# EAGLE board relay-unit-atmega (EAGLE 6.5.0)
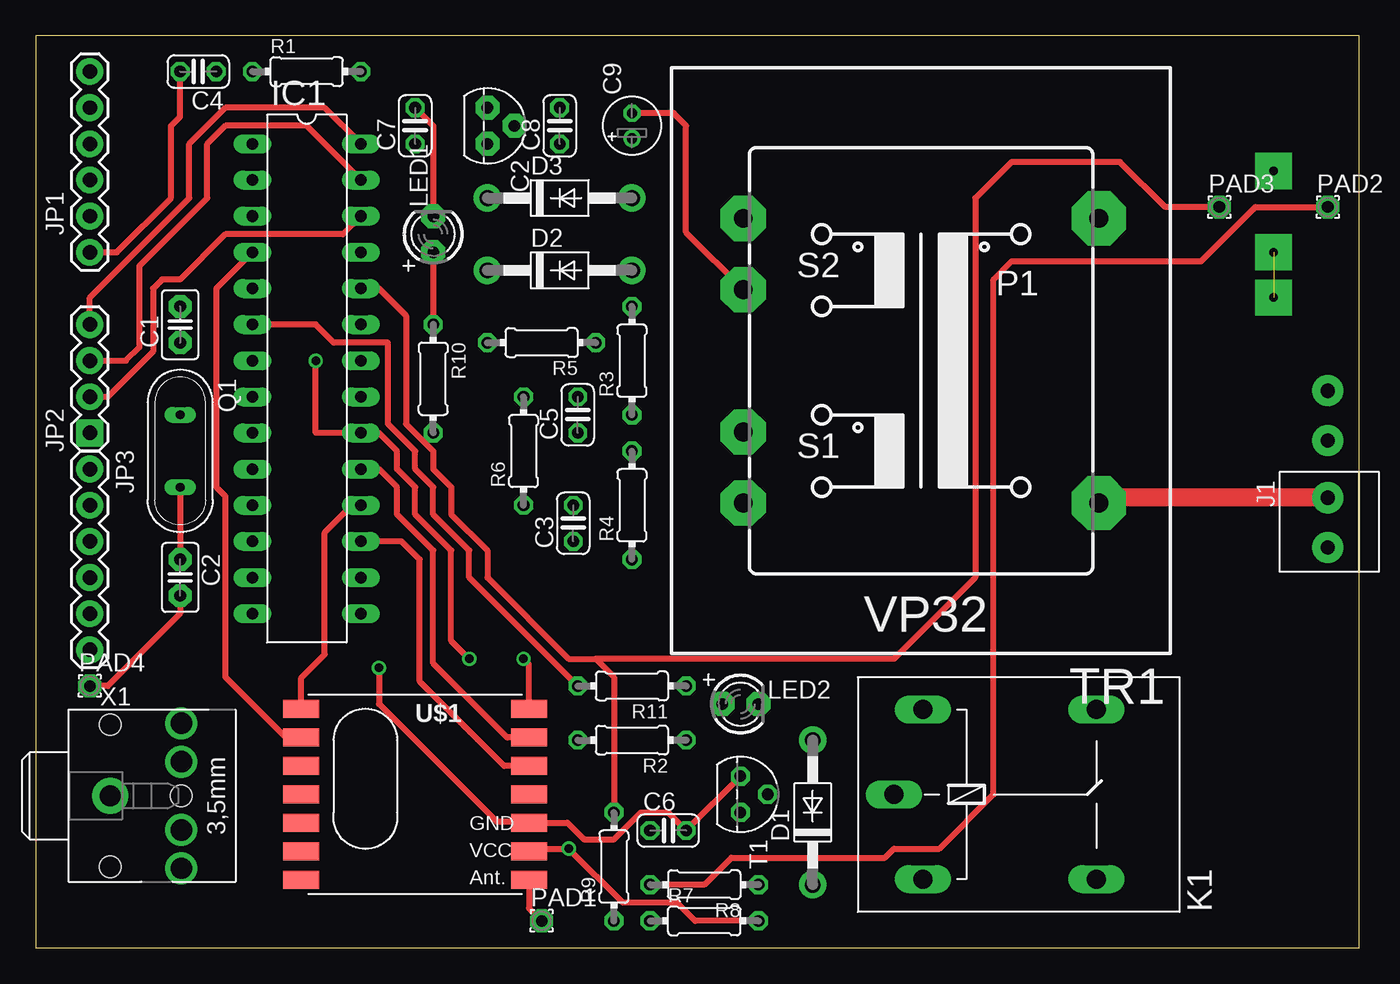
[diagram p0: board, top side]
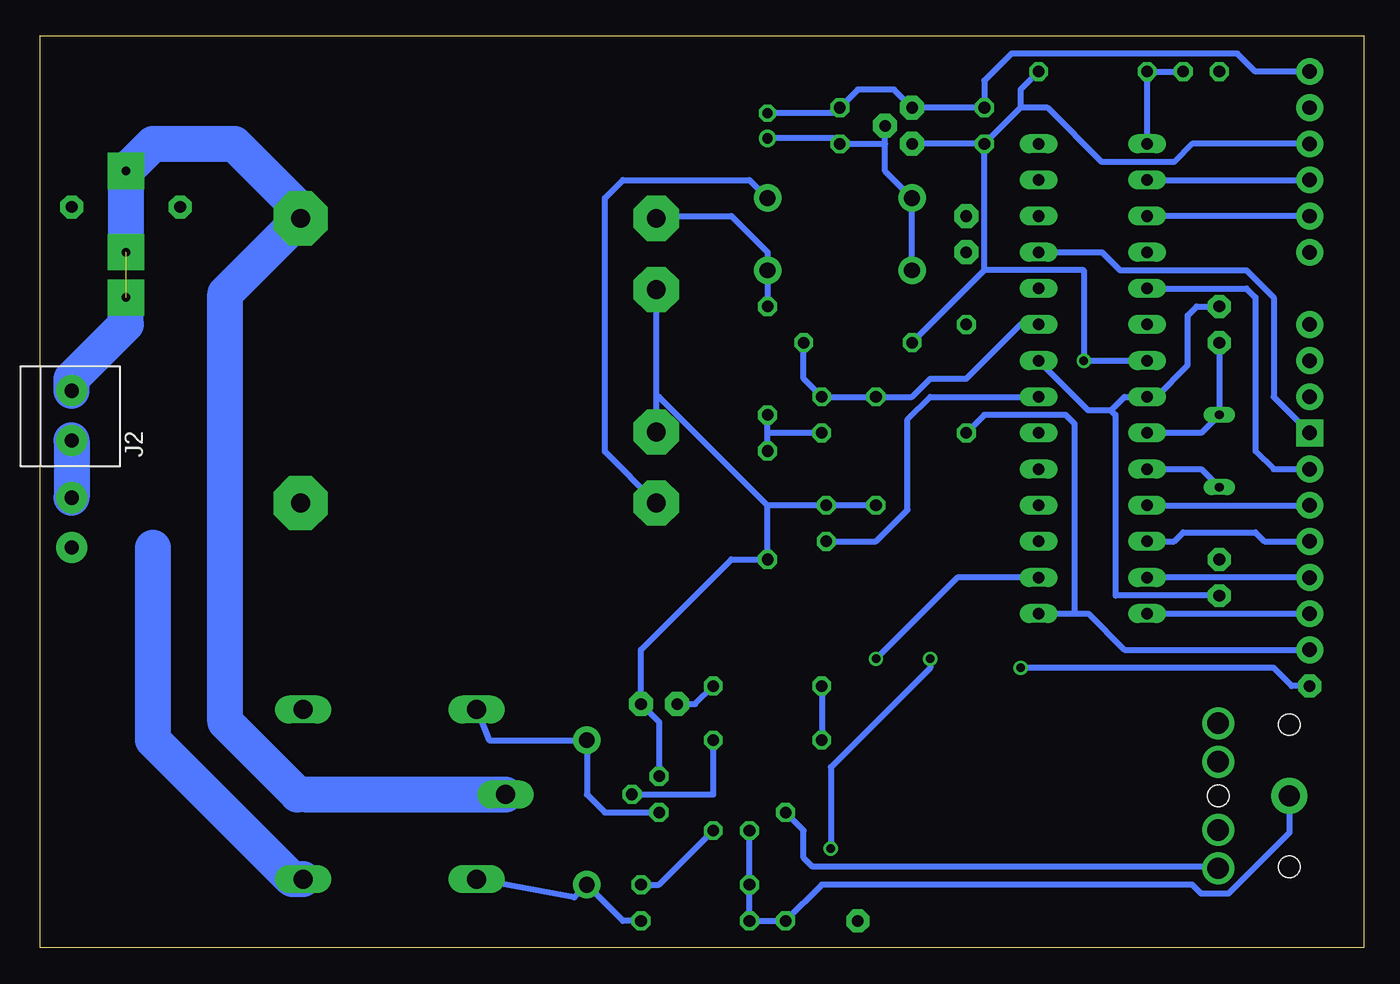
[diagram p1: board, bottom side, seen from below]

Size 93.02 x 64.12 mm. Coordinates in mm from the lower left corner, seen from the top.
Outline: 0,0 93.02,0 93.02,64.12 0,64.12 0,0
Copper layers (1*16): Top 0.035mm / dielectric 1.5mm / Bottom 0.035mm
Design rules "default": minimum track width 10mil, minimum drill 24mil, track to track 8mil, track to pad 8mil, pad to pad 8mil, via to via 8mil, smd to smd 8mil, copper to edge 40mil, drill to drill 8mil, minimum pad ring 10mil, minimum via ring 8mil, stop-mask expansion 4mil, vias tented up to drill 0mil, thermal gap 10mil

## Footprints (pad centres in the part's own frame; a part is rotated, then mirrored left to right if it is on the bottom)
C2.5-2 = drill 0.813 pad 1.6 octagon: 1 -1.27,0; 2 1.27,0
C025-024X044 = drill 0.813 octagon: 1 -1.27,0; 2 1.27,0
E1,8-4 = drill 0.711 pad 1.168: + -0.889,0 | drill 0.711 pad 1.168 octagon: - 0.889,0
DO41-10 = drill 1.118 pad 1.93: A 5.08,0; C -5.08,0
DIL28-3 = drill 0.813 long: 1 -16.51,-3.81; 2 -13.97,-3.81; 3 -11.43,-3.81; 4 -8.89,-3.81; 5 -6.35,-3.81; 6 -3.81,-3.81; 7 -1.27,-3.81; 8 1.27,-3.81; 9 3.81,-3.81; 10 6.35,-3.81; 11 8.89,-3.81; 12 11.43,-3.81; 13 13.97,-3.81; 14 16.51,-3.81; 15 16.51,3.81; 16 13.97,3.81; 17 11.43,3.81; 18 8.89,3.81; 19 6.35,3.81; 20 3.81,3.81; 21 1.27,3.81; 22 -1.27,3.81; 23 -3.81,3.81; 24 -6.35,3.81; 25 -8.89,3.81; 26 -11.43,3.81; 27 -13.97,3.81; 28 -16.51,3.81
TO92 = drill 0.813 pad 1.676 octagon: 1 -1.27,0; 2 0,1.905; 3 1.27,0
1X2-3.5MM = drill 1 pad 2.184: 1 1.8,0; 2 -1.7,0
FTDI_BASIC = drill 1.016 pad 1.88: CTS 10.16,0; DTR 0,0; GND 12.7,0; RXI 2.54,0; TXO 5.08,0; VCC 7.62,0
1X04 = drill 1.016 pad 1.88 square: 1 0,0 | drill 1.016 pad 1.88: 2 2.54,0; 3 5.08,0; 4 7.62,0
1X06 = drill 1.016 pad 1.88: 1 0,0; 2 2.54,0; 3 5.08,0; 4 7.62,0; 5 10.16,0; 6 12.7,0
G5LE = drill 1.321 long: 1 -7.493,-5.969; 2 -7.493,5.969; O 4.699,5.969; P -9.525,0; S 4.699,-5.969
LED3MM = drill 0.813 pad 1.676 octagon: A -1.27,0; K 1.27,0
1,6/0,8 = drill 0.813 pad 1.6 octagon: 1 0,0
QS = drill 0.61 long: 1 -2.54,0; 2 2.54,0
0204/7 = drill 0.813 octagon: 1 -3.81,0; 2 3.81,0
TO92' = drill 0.813 octagon: 1 1.27,0; 2 0,1.905; 3 -1.27,0
VP32 = drill 1.321 pad 3.81 octagon: 1 -12.497,-10.008; 2 -12.497,10.008 | drill 1.321 pad 3.175 octagon: 3 12.497,10.008; 4 12.497,5.004; 5 12.497,-5.004; 6 12.497,-10.008
RFM12B = smd 2.54 x 1.27: ANT 8,-6; FFS -8,2; GND 8,-2; IRQ -8,4; P$8 -8,0; P$9 -8,-2; P$10 -8,-4; P$12 -8,-6; P$16 8,0; SCK 8,4; SDI 8,2; SDO -8,6; SEL 8,6; VDD 8,-4
STX3100 = drill 1.5 pad 2.54: 1 2.7,-0.1 | drill 1.5: 2 7.7,5; 3 7.7,2.3; 4 7.7,-2.5; 5 7.7,-5.2 | hole 1.5: 2.7,4.9; 2.7,-5.1; 7.7,-0.1

## Placement (x,y rotation side)
C1  22pF  [C2.5-2]  10.16,43.81 90 top
C2  22pF  [C2.5-2]  10.16,26.03 270 top
C3  0.1u  [C025-024X044]  37.78,29.84 90 top
C4  0.1u  [C025-024X044]  11.43,61.59 180 top
C5  10uF  [C025-024X044]  38.1,37.47 90 top
C6  10uF  [C025-024X044]  44.45,8.25 0 top
C7  0.1u  [C025-024X044]  26.67,57.78 90 top
C8  0.1u  [C025-024X044]  36.83,57.78 90 top
C9  10uf  [E1,8-4]  41.91,57.78 90 top
D1  1N4004  [DO41-10]  54.61,9.52 90 top
D2  1N4004  [DO41-10]  36.83,47.62 0 top
D3  1N4004  [DO41-10]  36.83,52.7 0 top
IC1  ATMEGA48/88/168-PU  [DIL28-3]  19.05,40.01 270 top
IC2  [TO92]  31.75,57.78 270 top
J1  1X2-3.5MM  [1X2-3.5MM]  90.8,29.84 90 top
J2  1X2-3.5MM  [1X2-3.5MM]  90.8,37.47 270 bottom
JP1  FTDI_BASICPTH  [FTDI_BASIC]  3.81,48.89 90 top
JP2  [1X04]  3.81,36.2 90 top
JP3  [1X06]  3.81,33.66 270 top
K1  G5LE  [G5LE]  69.85,10.8 0 top
LED1  [LED3MM]  27.94,50.17 90 top
LED2  [LED3MM]  49.53,17.15 0 top
PAD1  [1,6/0,8]  35.56,1.91 0 top
PAD2  [1,6/0,8]  90.8,52.07 0 top
PAD3  [1,6/0,8]  83.19,52.07 0 top
PAD4  [1,6/0,8]  3.81,18.41 0 top
Q1  16Mhz  [QS]  10.16,34.92 270 top
R1  10k  [0204/7]  19.05,61.59 0 top
R2  10k  [0204/7]  41.91,14.61 180 top
R3  [0204/7]  41.91,41.27 90 top
R4  [0204/7]  41.91,31.12 90 top
R5  470k  [0204/7]  35.56,42.55 180 top
R6  470k  [0204/7]  34.29,34.92 90 top
R7  470k  [0204/7]  46.99,1.91 0 top
R8  470k  [0204/7]  46.99,4.45 180 top
R9  100R  [0204/7]  40.64,5.71 90 top
R10  100R  [0204/7]  27.94,40.01 270 top
R11  100R  [0204/7]  41.91,18.41 180 top
T1  2N3904  [TO92']  49.53,10.8 270 top
TR1  [VP32]  62.23,41.27 180 top
U$1  RFM12B  [RFM12B]  26.67,10.8 0 top
X1  STEREOJACK  [STX3100]  2.54,10.8 0 top

## Library data of the parts
C1 C2 = capacitor-wima
C3-C8 = resistor
C9 R1-R11 = rcl
D1-D3 IC2 J1 J2 LED1 LED2 X1 = adafruit
IC1 = atmega8
JP1-JP3 = SparkFun
K1 = relay; OC_FARNELL: unknown; OC_NEWARK: unknown
PAD1-PAD4 = wirepad
Q1 = special
T1 = transistor
TR1 = trafo
U$1 = JeeParts

## Nets
GND: C1.2 C2.2 C3.2 C6.2 C7.2 C8.2 C9.- IC1.8 IC1.22 IC2.1 JP1.GND LED1.K LED2.K PAD4.1 R4.1 R6.1 R8.1 T1.3 TR1.4 TR1.5 U$1.GND
N$1: C1.1 IC1.9 Q1.1
N$2: C2.1 IC1.10 Q1.2
N$3: C4.2 JP1.DTR
N$4: C3.1 IC1.21
N$5: IC1.5 JP3.1
N$6: IC1.16 U$1.SEL
N$7: IC1.4 U$1.IRQ
N$8: C4.1 IC1.1 R1.1
N$9: IC1.17 U$1.SDI
N$10: IC1.19 U$1.SCK
N$11: IC1.18 U$1.SDO
N$12: PAD1.1 U$1.ANT
N$13: IC1.2 JP1.TXO
N$14: IC1.3 JP1.RXI
N$15: R2.1 T1.2
N$16: D1.A K1.2 T1.1
N$17: IC1.6 R2.2 R11.2
N$19: K1.S
N$20: J1.1 J2.1 TR1.2
N$21: D2.A R3.2 TR1.6
N$22: D3.A TR1.3
N$23: C5.2 IC1.23 R5.1 R6.2
N$24: C5.1 R3.1 R4.2
N$25: IC1.24 PAD3.1 R9.2 X1.5
N$26: C6.1 PAD2.1 R7.1 R8.2 R9.1 X1.1
N$27: C8.1 C9.+ D2.C D3.C IC2.2
N$28: IC1.25 JP2.1
N$29: IC1.26 JP2.2
N$30: IC1.27 JP2.3
N$31: IC1.28 JP2.4
N$32: IC1.11 JP3.2
N$33: IC1.12 JP3.3
N$34: IC1.13 JP3.4
N$35: IC1.14 JP3.5
N$36: IC1.15 JP3.6 R10.2
N$37: LED1.A R10.1
N$38: LED2.A R11.1
N$40: J2.2 K1.P TR1.1
VCC: C7.1 D1.C IC1.7 IC1.20 IC2.3 JP1.VCC K1.1 R1.2 R5.2 R7.2 U$1.VDD

## Tracks (layer width: path | path; a pad name or v marks a point on that pad's centre or on a via)
GND  (via drill 0.6)
  Top 0.406: TR1.5 45.72,50.29 45.72,57.78 44.83,58.67 C9.- | C7.2 27.94,57.78 LED1.K | T1.3 C6.2 44.45,9.52 42.55,9.52 40.64,7.62 38.55,7.62 37.37,8.8 U$1.GND 34.58,8.89 32.38,8.89 24.13,17.15 v24.13,19.69 | C2.2 10.16,23.49 5.08,18.41 PAD4.1
  Bottom 0.406: C9.- 37.21,58.67 C8.2 35.56,60.33 33.02,60.33 IC2.1 C7.2 26.67,60.96 24.77,62.86 8.89,62.86 7.62,61.59 JP1.GND | TR1.5 49.73,38.73 | 49.73,38.73 TR1.4 | 41.91,31.12 R4.1 44.45,27.3 50.8,20.95 LED2.K 49.53,15.88 T1.3 | 41.91,31.12 49.53,38.73 49.73,38.73 | C2.2 17.46,24.77 17.46,37.47 17.78,37.78 | 17.78,37.78 16.83,38.73 IC1.8 14.61,38.73 12.38,40.96 12.38,44.45 11.75,45.09 C1.2 | R6.1 C3.2 41.91,31.12 | 17.78,37.78 19.37,37.78 IC1.22 | R8.1 49.53,4.45 C6.2 | PAD4.1 5.08,18.41 6.35,19.69 v24.13,19.69
N$1
  Bottom 0.406: C1.1 Q1.1 11.43,36.2 IC1.9
N$2
  Top 0.406: Q1.2 C2.1
  Bottom 0.406: IC1.10 11.43,33.66 Q1.2
N$3
  Top 0.406: JP1.DTR 5.71,48.89 9.52,52.7 9.52,57.78 10.16,58.42 C4.2
N$4
  Bottom 0.406: C3.1 34.29,28.58 32.07,30.8 32.07,37.15 30.48,38.73 IC1.21
N$5
  Bottom 0.406: IC1.5 8.25,46.35 7.62,45.72 7.62,34.92 6.35,33.66 JP3.1
N$6  (via drill 0.6 pad 0.41)
  Top 0.406: U$1.SEL 34.67,19.94 v34.29,20.32
  Bottom 0.406: IC1.16 28.58,26.03 v34.29,20.32
N$7
  Top 0.406: U$1.IRQ 17.59,14.8 13.34,19.05 13.34,31.75 12.7,32.38 12.7,46.35 IC1.4
N$8
  Bottom 0.406: IC1.1 R1.1 C4.1
N$9
  Top 0.406: U$1.SDI 32.92,12.8 26.99,18.73 26.99,27.3 25.72,28.58 IC1.17
N$10
  Top 0.406: U$1.SCK 33.15,14.8 27.94,20 27.94,27.94 25.4,30.48 25.4,32.38 24.13,33.66 IC1.19
N$11
  Top 0.406: U$1.SDO 18.67,18.99 20.32,20.64 20.32,29.21 22.22,31.12 IC1.18
N$12
  Top 0.406: U$1.ANT 34.67,2.8 PAD1.1
N$13
  Bottom 0.406: IC1.2 JP1.TXO
N$14
  Bottom 0.406: JP1.RXI IC1.3
N$15
  Bottom 0.406: T1.2 45.72,10.8 R2.1
N$16
  Bottom 0.406: K1.2 61.47,14.61 D1.A 54.61,10.8 53.34,9.52 T1.1
N$17
  Top 0.406: R11.2 30.48,26.03 30.48,27.94 27.94,30.48 27.94,32.38 26.67,33.66 26.67,34.92 24.77,36.83 24.77,42.55 20.95,42.55 19.68,43.81 IC1.6
  Bottom 0.406: R11.2 R2.2
N$19
  Bottom 2.54: K1.S 75.31,4.83 85.09,14.61 85.09,28.15
N$20
  Top 1.27: J1.1 75.1,31.65 TR1.2
  Bottom 2.54: J2.1 J1.1
N$21
  Bottom 0.406: R3.2 D2.A 41.91,48.89 44.45,51.44 49.58,51.44 TR1.6
N$22
  Bottom 0.406: TR1.3 53.34,34.87 53.34,52.7 52.07,53.97 43.18,53.97 D3.A
N$23
  Bottom 0.406: R5.1 39.37,40.01 C5.2 R6.2 31.75,38.73 30.48,40.01 27.94,40.01 24.13,43.81 IC1.23
N$24
  Bottom 0.406: C5.1 41.91,36.2 | 41.91,36.2 R3.1 | R4.2 41.91,36.2
N$25
  Top 0.406: PAD3.1 79.38,52.07 76.2,55.25 68.58,55.25 66.04,52.7 66.04,26.03 60.33,20.32 39.37,20.32 | IC1.24 24.13,46.35 26.03,44.45 26.03,36.83 27.94,34.92 27.94,33.66 29.21,32.38 29.21,30.48 31.75,27.94 31.75,26.03 37.46,20.32 39.37,20.32 | 39.37,20.32 40.64,19.05 R9.2
  Bottom 0.406: X1.5 10.68,5.59 10.79,5.71 38.73,5.71 39.37,6.35 39.37,8.25 R9.2
N$26
  Top 0.406: R8.2 46.99,4.45 48.89,6.35 59.69,6.35 60.33,6.98 63.5,6.98 67.31,10.8 67.31,46.99 68.58,48.26 81.92,48.26 85.72,52.07 PAD2.1
  Bottom 0.406: C6.1 R8.2 R7.1 R9.1 38.1,4.45 12.06,4.45 11.43,3.81 9.52,3.81 5.24,8.09 X1.1
N$27
  Bottom 0.406: 33.66,56.52 33.66,54.61 D3.C D2.C | 33.66,56.52 IC2.2 | 33.66,56.52 C8.1 37.21,56.9 C9.+
N$28
  Bottom 0.406: IC1.25 18.41,48.89 17.14,47.62 8.25,47.62 6.35,45.72 6.35,38.73 JP2.1
N$29
  Top 0.406: IC1.26 21.59,50.17 13.34,50.17 10.16,46.99 8.89,46.99 8.25,46.35 8.25,41.91 5.08,38.73 JP2.2
N$30
  Top 0.406: IC1.27 19.05,57.78 13.34,57.78 12.06,56.52 12.06,52.7 7.3,47.94 7.3,42.23 6.35,41.27 JP2.3
N$31
  Top 0.406: IC1.28 20.32,59.06 13.34,59.06 10.79,56.52 10.79,52.7 3.81,45.72 JP2.4
N$32
  Bottom 0.406: IC1.11 JP3.2
N$33
  Bottom 0.406: IC1.12 13.34,28.58 12.7,29.21 7.62,29.21 6.98,28.58 JP3.3
N$34
  Bottom 0.406: JP3.4 IC1.13
N$35
  Bottom 0.406: IC1.14 JP3.5
N$36
  Bottom 0.406: 20.32,23.49 19.37,23.49 16.83,20.95 JP3.6 | IC1.15 20.32,23.49 | 20.32,23.49 20.32,36.83 20.95,37.47 26.67,37.47 R10.2
N$37
  Top 0.406: LED1.A R10.1
N$38
  Bottom 0.406: LED2.A 46.99,17.15 R11.1
N$40  (via drill 0.6 pad 2.54)  (1 unrouted)
  Bottom 0.406: K1.P 60.96,10.8 | 77.47,13.34 76.83,13.34 | 74.3,10.8 74.93,10.8
  Bottom 2.54: v87,48.89 v87,54.61 85.09,56.52 79.38,56.52 74.3,51.44 | 74.3,10.8 K1.P | 74.93,10.8 77.47,13.34 80.01,15.88 80.01,46 TR1.1 | TR1.1 74.45,51.28 | 74.45,51.28 74.3,51.44 | 74.3,51.44 74.57,51.44 TR1.1 | J2.2 90.8,40.01 87,43.81 v87,45.72 | 74.45,51.28 74.93,50.8
VCC  (via drill 0.6, 0.6 pad 0.41)
  Top 0.406: U$1.VDD 35.12,6.8 35.56,6.35 35.56,6.98 v37.46,6.98 41.27,3.18 45.09,3.18 46.35,1.91 R7.2 | v30.48,20.32 29.21,21.59 29.21,27.94 26.67,30.48 26.67,32.38 25.4,33.66 25.4,34.92 24.13,36.2 IC1.20 19.68,36.2 v19.68,41.27
  Bottom 0.406: C7.1 IC2.3 | R5.2 26.67,47.62 | 26.67,47.62 C7.1 | K1.1 55.5,3.56 D1.C 52.07,1.91 R7.2 | R1.2 24.13,60.33 24.13,59.06 | 24.13,59.06 C7.1 | 26.67,47.62 19.68,47.62 v19.68,41.27 IC1.7 | JP1.VCC 12.06,56.52 13.34,55.25 18.41,55.25 22.22,59.06 24.13,59.06 | v30.48,20.32 30.48,19.69 37.46,12.7 v37.46,6.98